# Altium PCB PCB1-B-EVT2.PcbDoc (part 5 of 5)
Units mil, origin at the board's own origin, x right, y up, seen from the top; angles counter-clockwise.
Board outline 3000.03 x 3779.56 mil, 2 copper layers (Top Layer, Bottom Layer); 115 components, 91 nets, 486 pads, 285 vias.
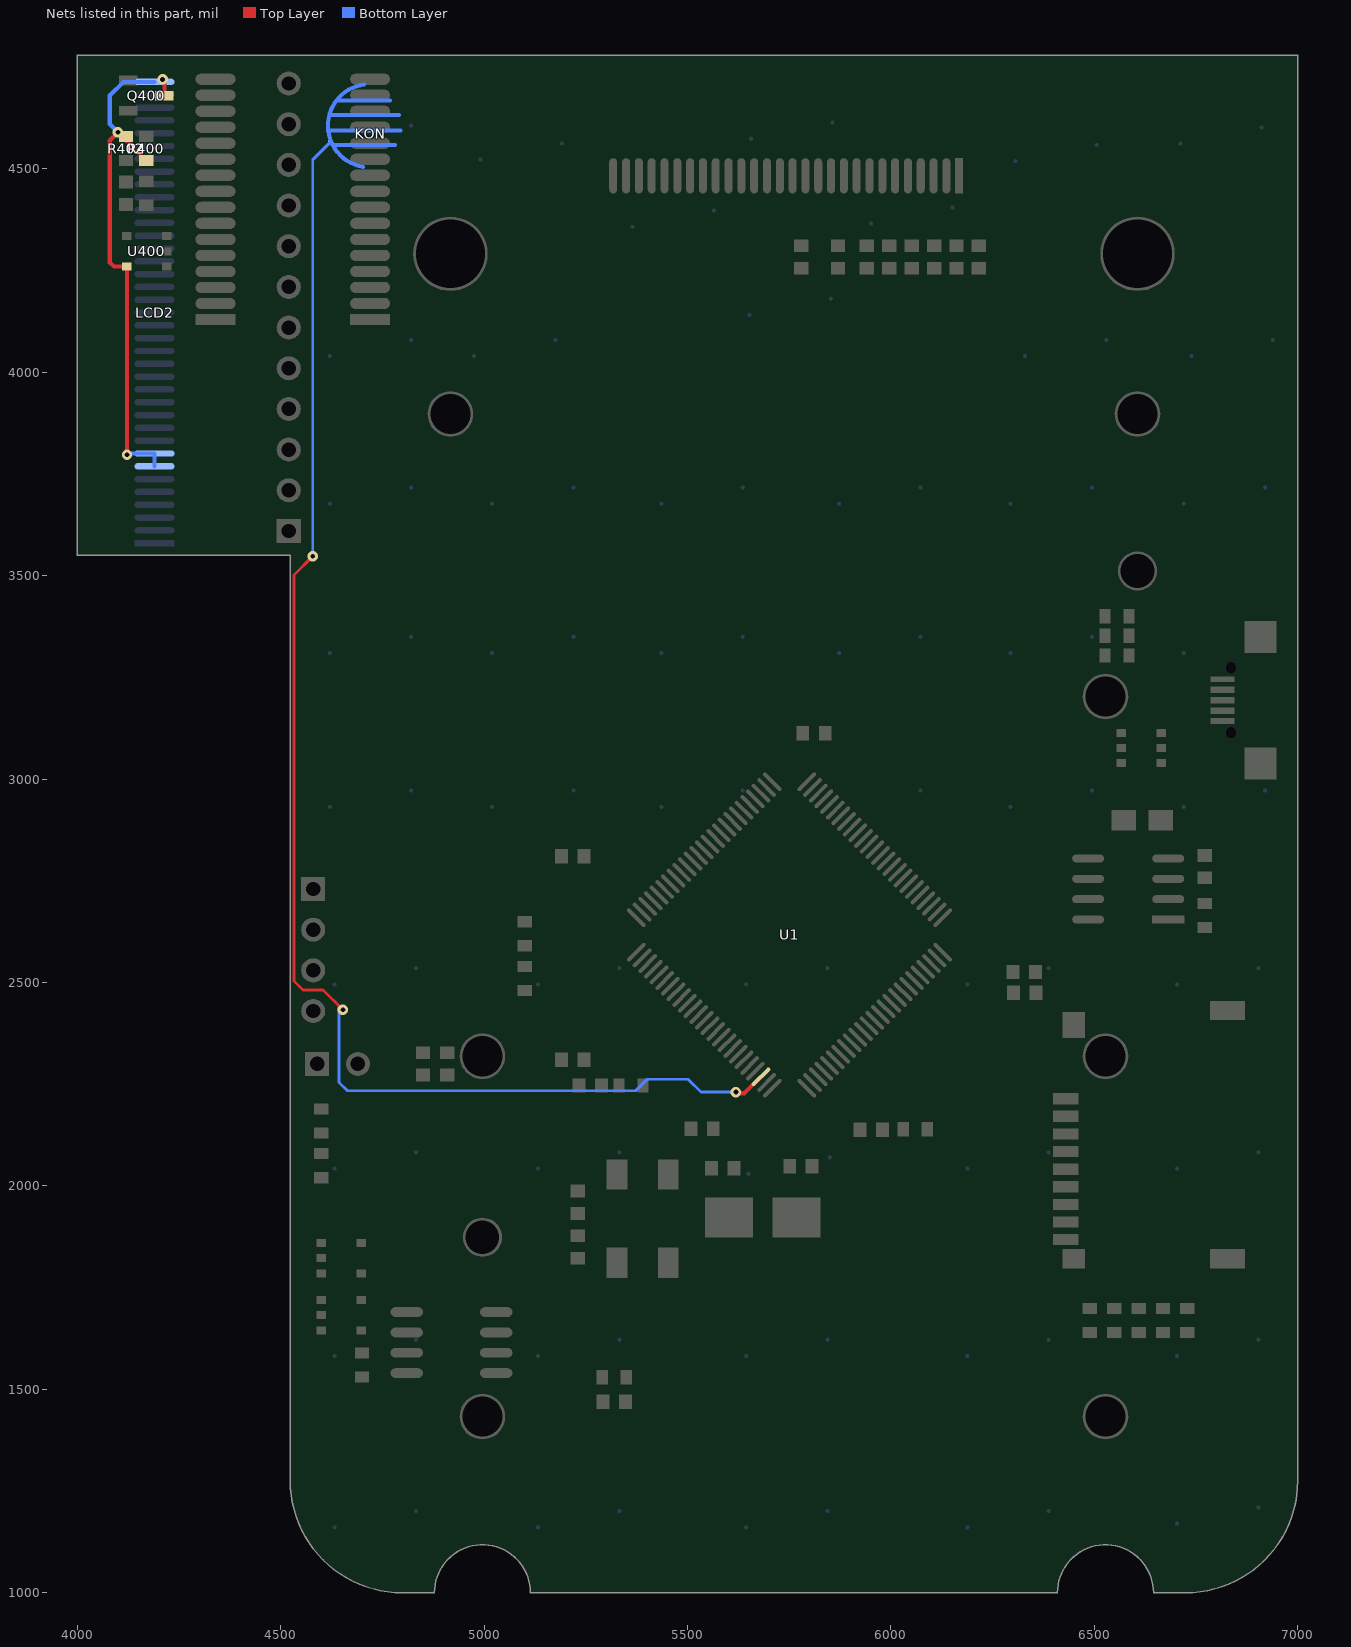
[diagram p5: the nets of this part, all layers, seen from the top]

## Via types
v1: diameter 25.59, hole 11.81, Top Layer to Bottom Layer, 281 vias
v2: diameter 25.59, hole 11.81, Top Layer to Bottom Layer, tented both sides, 2 vias
v3: diameter 39.37, hole 39.37, Top Layer to Bottom Layer, tented both sides, 2 vias

## Nets (pads, with @x,y where several pads share a name; then routed paths per layer and width w, separated by ;. In a path a pad name is that pad's centre, name@x,y a point inside that pad or via, vN(x,y) a via of type N, cw(c..) or ccw(c..) an arc to the next point about the centre after c; other vN are vias at no path point) (continued)
VTFT: LCD2.7 LCD2.8 LCD2.37 Q400.3 R400.2 R402.2 U400.5 | length 1292.9
  Top Layer w7: R400.2@4169.53,4520.47 R400.2@4170,4520.47 R400.2@4180,4520.47
  Top Layer w10: v2(4100,4590) 4080,4570 4080,4270 4090,4260 U400.5@4121.58,4260 4122.47,4259.1 v1(4122.47,3797.53) ; R402.2@4120,4579.53 4120,4570 R400.2@4169.53,4520.47 ; v2(4210,4720) 4214.29,4715.71 Q400.3@4214.29,4680
  Bottom Layer w10: v2(4100,4590) 4080,4610 4080,4680 4113.86,4713.86 LCD2.37@4190,4713.86 ; v1(4122.47,3797.53) 4122.47,3800.47 LCD2.8@4190,3800.47 LCD2.7@4190,3768.98
WKUP: KON.2 U1.23 | length 3538
  Top Layer w7: v1(4579,3548) 4533.12,3502.12 4533.12,2503.88 4555,2482 4604,2482 v1(4653,2433)
  Top Layer w10: v1(5619.04,2230.8) 5621.83,2228 5640.39,2228 U1.23@5680.71,2268.32
  Bottom Layer w7: v1(4579,3548) 4579,4522.59 4621.85,4565.44 KON.2@4623.89,4567.48 ; v1(4653,2433) 4651.53,2433 4643.53,2441 4643.53,2254.47 4664,2234 5373.12,2234 5401.41,2262.3 5501.7,2262.3 5533.2,2230.8 v1(5619.04,2230.8)
pads on no net: CON200.6 CON200.7 CON300.0 D200.1 D200.3 LCD2.1 LCD2.2 LCD2.3 LCD2.4 LCD2.5 LCD2.9 U1.7 U1.15 U1.16 U1.33 U1.34 U1.36 U1.44 U1.45 U1.46 U1.47 U1.48 U1.55 U1.56 U1.57 U1.59 U1.60 U1.63 U1.64 U1.67 U1.68 U1.77 U1.84 U1.87 U101.4 U102.4 U400.4 X3.2 X3.3
copper on no net: | length 13592.2
  Top Layer w0: 4000,3550 4000,4779.53 6189.53,4779.53 7000,4779.53 7000,1275.59 cw(c6724.41,1275.59) 6724.41,1000 6645.67,1000 ccw(c6527.56,1000) 6409.45,1000 5114.17,1000 ccw(c4996.06,1000) 4877.95,1000 4799.21,1000 cw(c4799.21,1275.59) 4523.62,1275.59 4523.62,3380 4523.62,3520 4523.62,3550 4000,3550
  other v3: 6843.57,1931.12 6843.57,2246.08

## Other copper
Top Layer:
  text "Entry" at 5271.65,1326.77 h62.99
  text "ArithMax" at 4630,1211 h275.59
  text "宁波中学张文挺设计" at 4674,1142 h70

## Silkscreen, mask and mechanical layers (free items; w line width, h text height)
Top Paste:
  text "Entry" at 5271.65,1326.77 h62.99
  text "ArithMax" at 4630,1211 h275.59
  text "宁波中学张文挺设计" at 4674,1142 h70
Top Solder:
  text "Entry" at 5271.65,1326.77 h62.99
  text "ArithMax" at 4630,1211 h275.59
  text "宁波中学张文挺设计" at 4674,1142 h70